# Altium PCB Nissan-RB25DET-ECU.PcbDoc (part 1 of 2)
Units mm, origin at the board's own origin, x right, y up, seen from the top; angles counter-clockwise.
Board outline 159 x 152 mm, 2 copper layers (Top Layer, Bottom Layer); 165 components, 7 nets, 721 pads, 78 vias.
Unrouted connection lines stored in the file: 23.
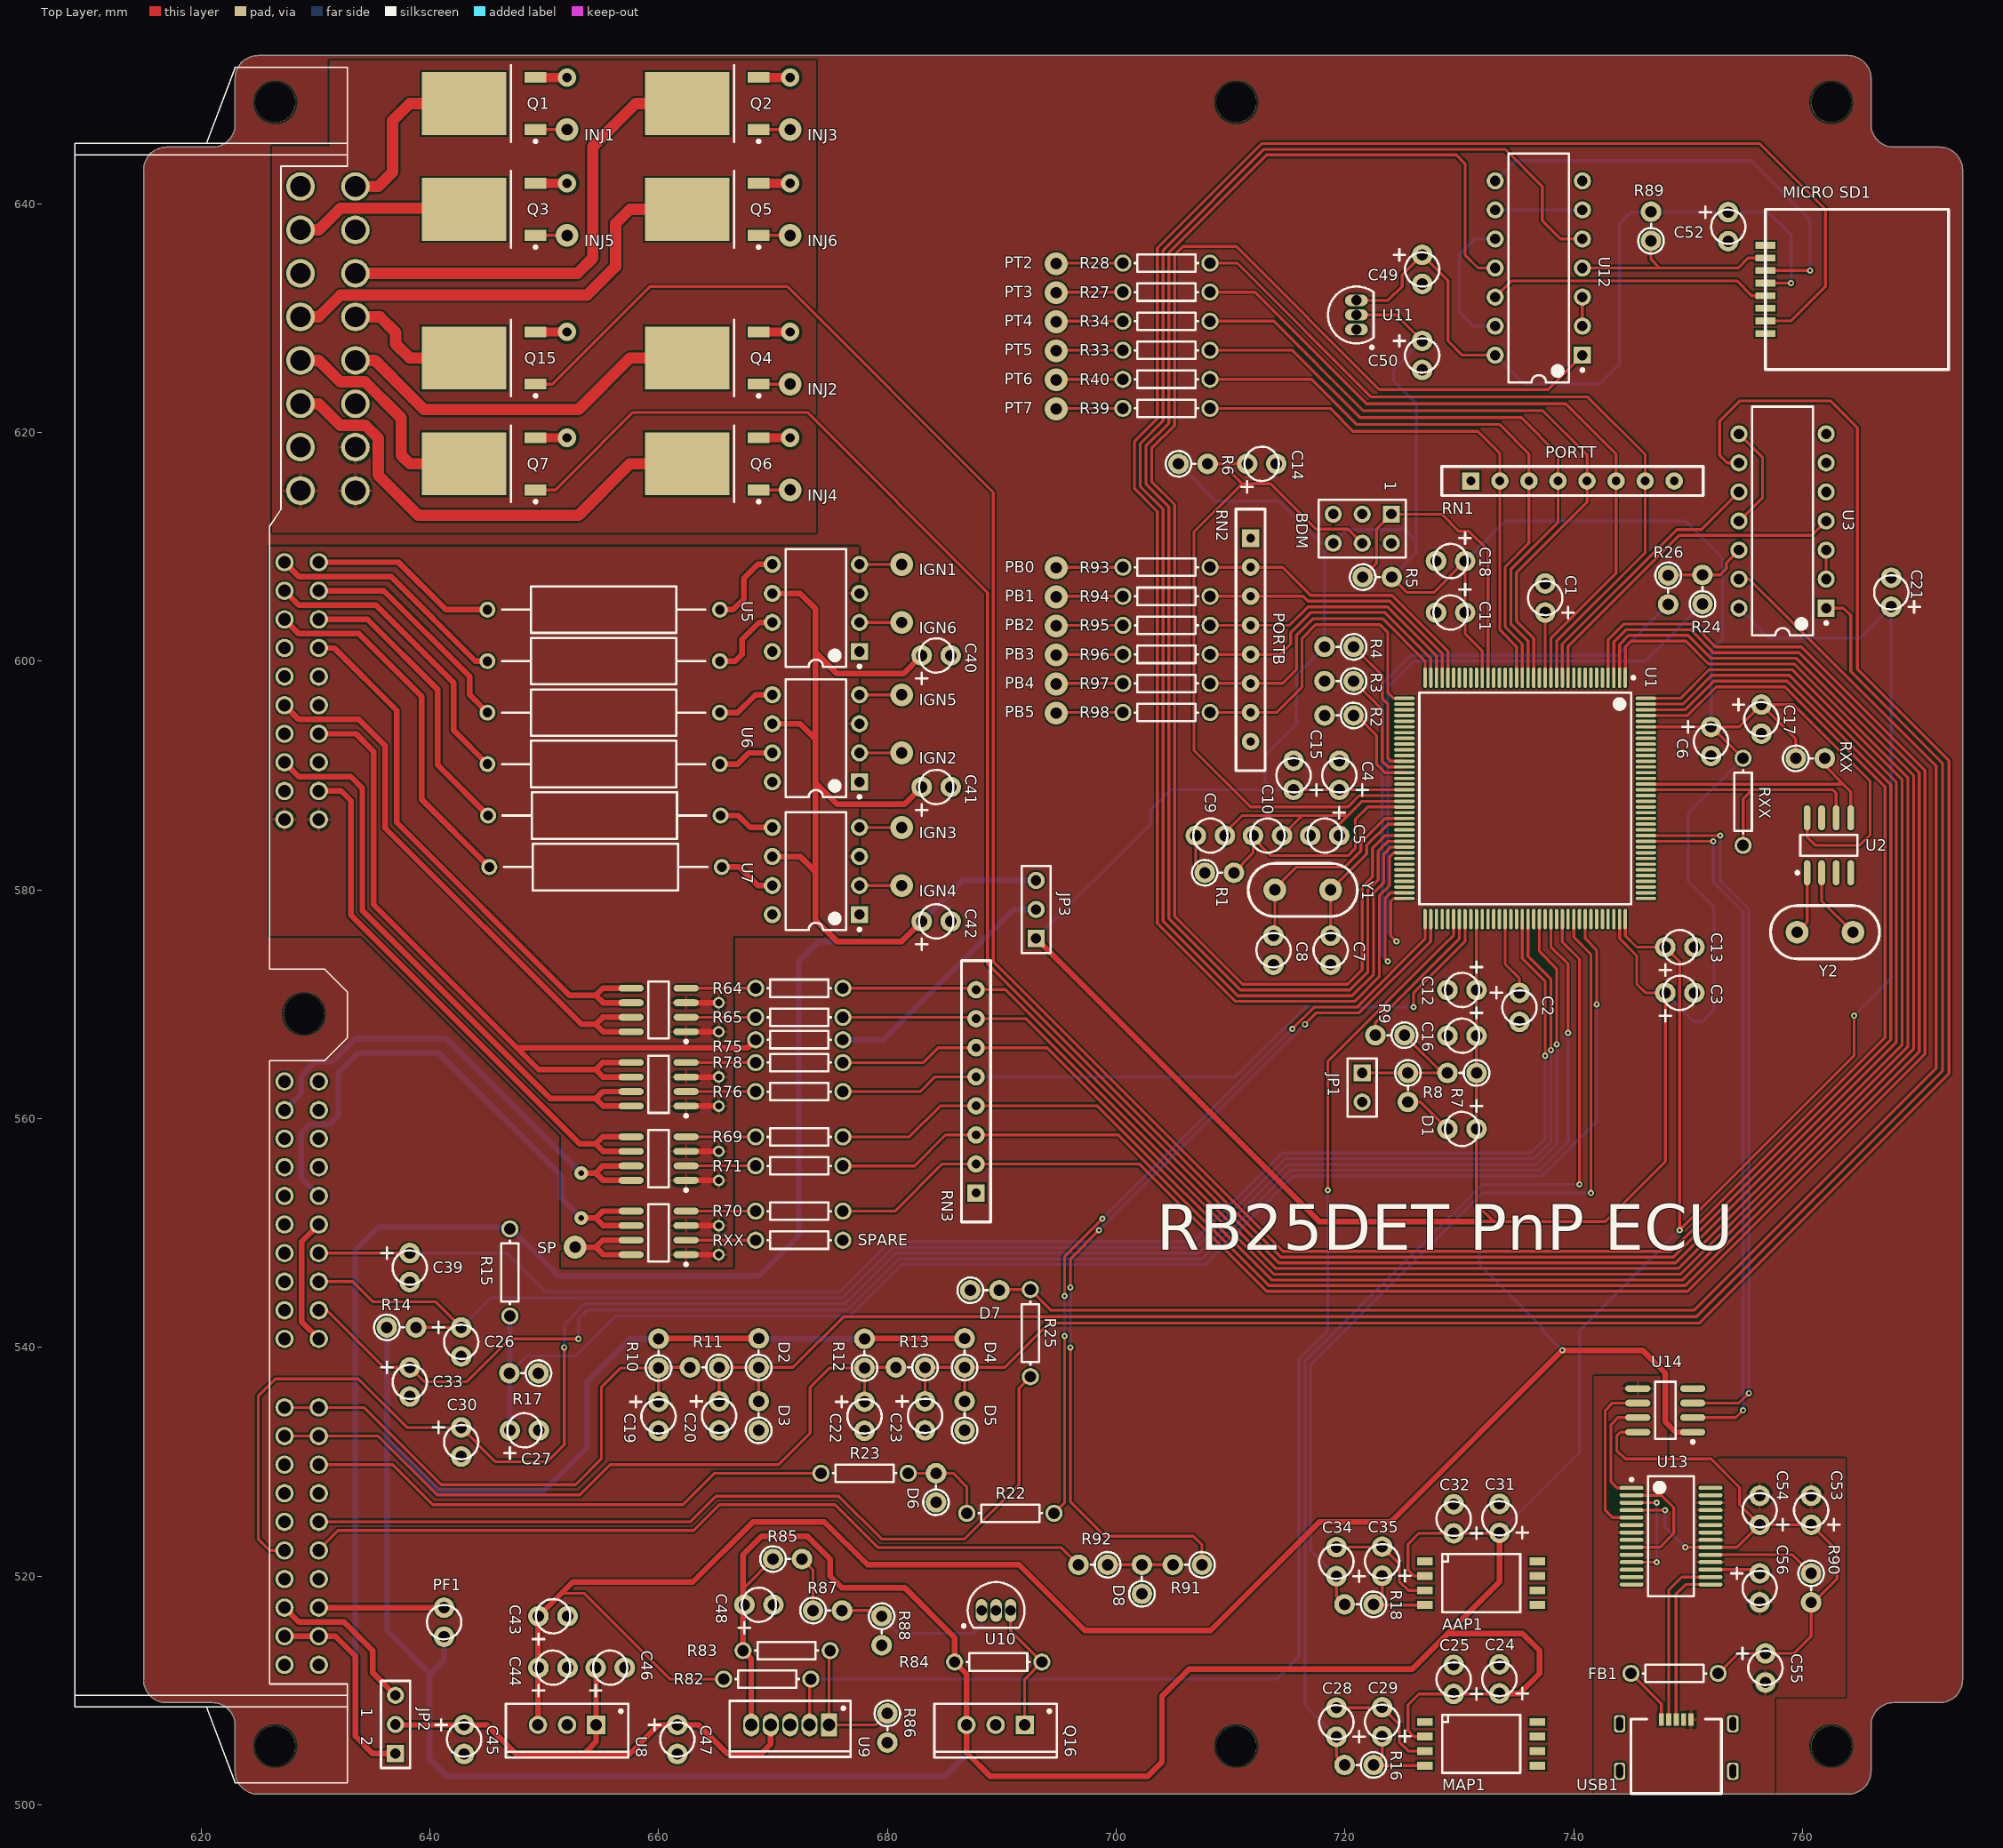
[diagram p0: Top Layer view]
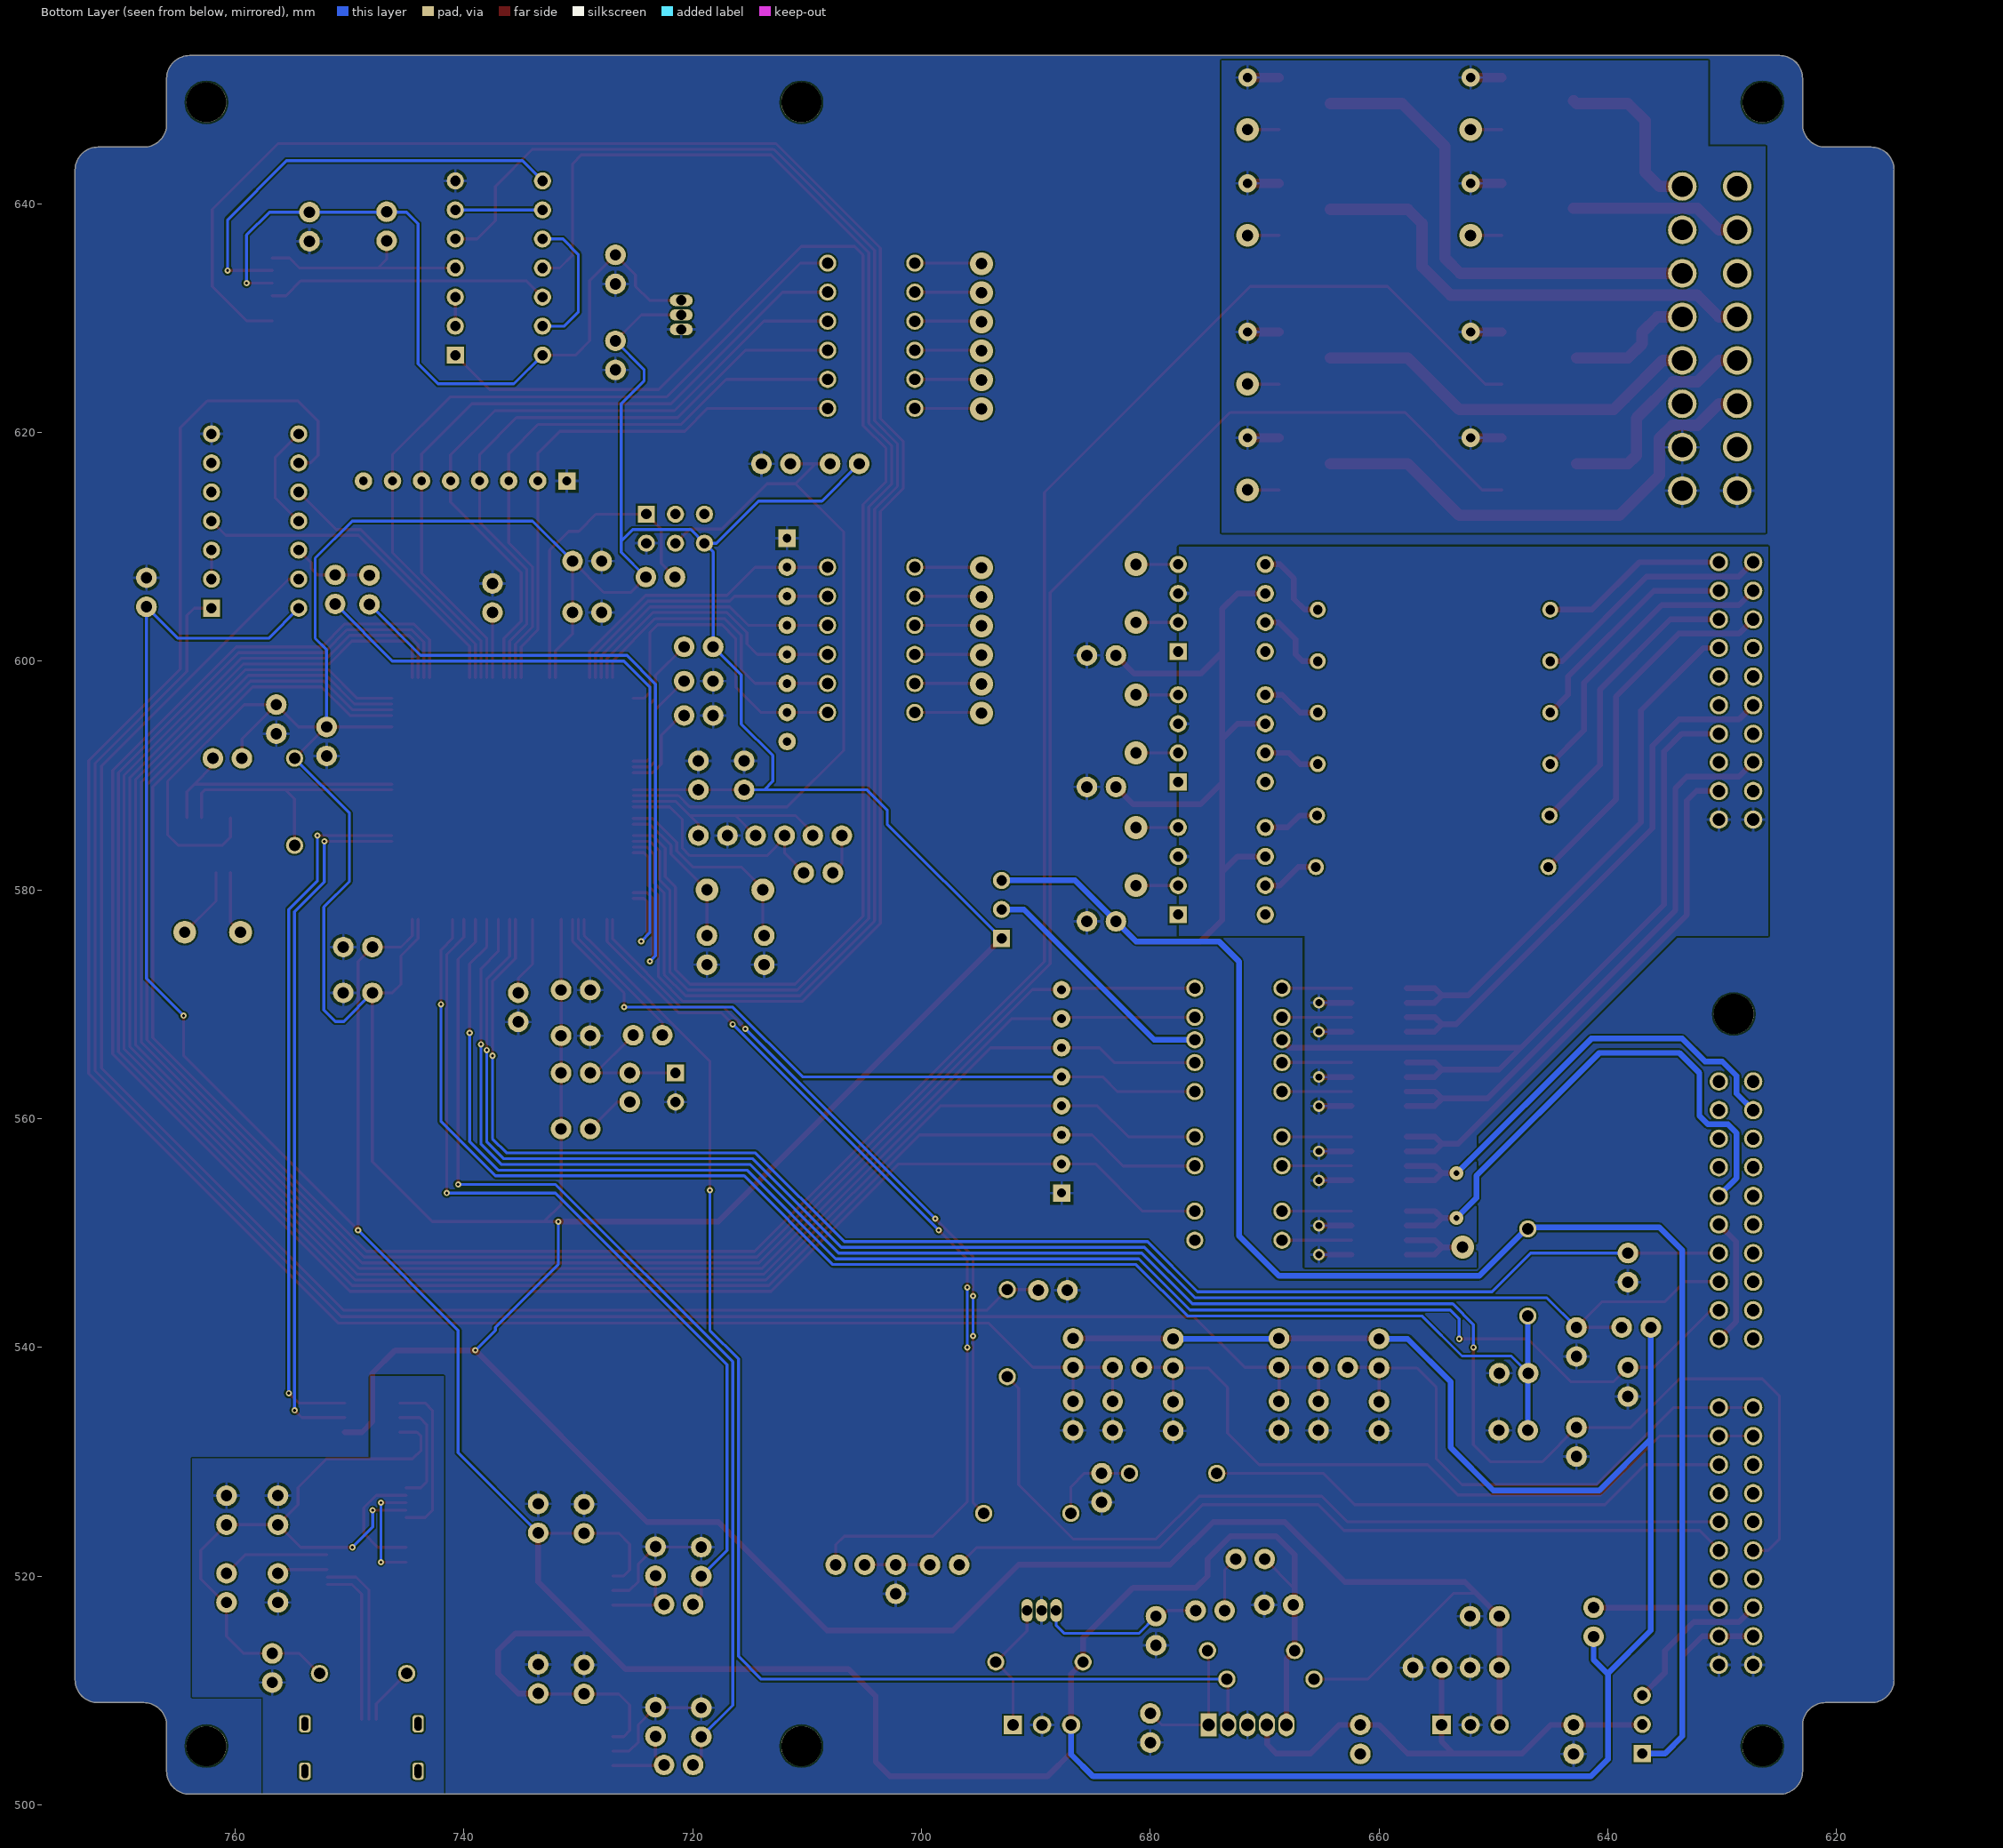
[diagram p1: Bottom Layer view, seen from below]

## Layer stack, top to bottom
Top Solder: solder mask 0.0102, Solder Resist, Dk 3.5
Top Layer: signal copper 0.0356
Dielectric1: dielectric 0.32, FR-4, Dk 4.8
Bottom Layer: signal copper 0.0356
Bottom Solder: solder mask 0.0102, Solder Resist, Dk 3.5

## Board outline
622.983,502.945 622.983,506.945 ccw(c620.983,506.945) 620.983,508.945 616.983,508.945 cw(c616.983,510.945) 614.983,510.945 614.983,642.945 cw(c616.983,642.945) 616.983,644.945 620.983,644.945 ccw(c620.983,646.945) 622.983,646.945 622.983,650.945 cw(c624.983,650.945) 624.983,652.945 763.983,652.945 cw(c763.983,650.945) 765.983,650.945 765.983,646.945 ccw(c767.983,646.945) 767.983,644.945 771.983,644.945 cw(c771.983,642.945) 773.983,642.945 773.983,510.945 cw(c771.983,510.945) 771.983,508.945 767.983,508.945 ccw(c767.983,506.945) 765.983,506.945 765.983,502.945 cw(c763.983,502.945) 763.983,500.945 624.983,500.945 cw(c624.983,502.945)

## Design rules (kind name [scope] priority, off if disabled: settings)
Clearance [All] p1: gap=0.152 ignorepadtopadclearanceinfootprint=FALSE
ComponentClearance [All] p1: gap=0.15 collisioncheckmode=3 verticalgap=0.15 showdistances=FALSE
PolygonConnect [All] p1: connectstyle=Relief reliefconductorwidth=0.254 reliefentries=4 polygonreliefangle="90 Angle" airgapwidth=0.254
RoutingVias [All] p1: holewidth=0.254 width=0.55 viastyle="Through Hole" minholewidth=0.254 minwidth=0.55 maxholewidth=0.711 maxwidth=1.27
ShortCircuit [All] p1: allowed=TRUE
SilkToSolderMaskClearance [IsPad] p1: minsilkscreentomaskgap=0.15 clearancetoexposedcopper=TRUE
SolderMaskExpansion [All] p1: expansion=0.102 istentingtop=FALSE
Width [All] p1: maxlimit=5 minlimit=0.254 preferedwidth=0.254 minimp=50.000000 maximp=50.000000 favimp=50.000000
27 further rules are at their usual default settings.

## Components (designator, comment, footprint, x,y, rotation, side; value= is the part's Value field where it differs from the comment)
AAP1 "Comment" SSOP8 727,521.29 r0 top
C1 "" CAP2.54 737.5,604.25 r90 top
C2 "" CAP2.54 735.25,571 r270 top
C3 "" CAP2.54 748,571 r0 top
C4 "" CAP2.54 719.5,588.75 r90 top
C5 "" CAP2.54 719.5,584.75 r180 top
C6 "" CAP2.54 752,594.25 r270 top
C7 "" CAP2.54NP 718.75,576 r270 top
C8 "" CAP2.54NP 713.75,576 r270 top
C9 "" CAP2.54NP 709.5,584.75 r180 top
C10 "" CAP2.54NP 714.5,584.75 r180 top
C11 "" CAP2.54 730.5,604.25 r180 top
C12 "" CAP2.54 731.5,571.25 r180 top
C13 "" CAP2.54 748,575 r0 top
C14 "" CAP2.54 711.45,617.25 r0 top
C15 "" CAP2.54 715.5,588.75 r90 top
C16 "" CAP2.54 731.5,567.25 r180 top
C17 "" CAP2.54 756.4,596.2 r270 top
C18 "" CAP2.54 730.5,608.75 r180 top
C19 "" CAP2.54 660,535.25 r270 top
C20 "" CAP2.54 665.29,535.29 r270 top
C21 "" CAP2.54 767.75,604.75 r90 top
C22 "" CAP2.54 678,535.25 r270 top
C23 "" CAP2.54 683.29,535.29 r270 top
C24 "" CAP2.54 733.5,509.75 r90 top
C25 "" CAP2.54 729.5,509.71 r90 top
C26 "" CAP2.54 642.75,541.75 r270 top
C27 "" CAP2.54 647,532.75 r0 top
C28 "" CAP2.54 719.25,505.96 r90 top
C29 "" CAP2.54 723.25,506 r90 top
C30 "" CAP2.54 642.75,533 r270 top
C31 "" CAP2.54 733.5,523.79 r90 top
C32 "" CAP2.54 729.5,523.75 r90 top
C33 "" CAP2.54 638.25,538.25 r270 top
C34 "" CAP2.54 719.25,520 r90 top
C35 "" CAP2.54 723.25,520.04 r90 top
C39 "" CAP2.54 638.25,548.25 r270 top
C40 "" CAP2.54 683,600.5 r0 top
C41 "" CAP2.54 683,589 r0 top
C42 "" CAP2.54 683,577.25 r0 top
C43 "" CAP2.54 649.5,516.5 r0 top
C44 "" CAP2.54 649.5,512 r0 top
C45 "" CAP2.54 643,507 r270 top
C46 "" CAP2.54 654.5,512 r0 top
C47 "" CAP2.54 661.64,507 r270 top
C48 "" CAP2.54 667.5,517.5 r0 top
C49 "" CAP2.54 726.75,635.52 r270 top
C50 "" CAP2.54 726.75,628 r270 top
C52 "" CAP2.54 753.5,639.25 r270 top
C53 "" CAP2.54 760.75,524.5 r90 top
C54 "" CAP2.54 756.25,524.5 r90 top
C55 "" CAP2.54 756.75,513.25 r270 top
C56 "" CAP2.54 756.25,520.25 r270 top
D1 "" CAP2.54 731.5,559.1 r180 top
D2 "" RES2.54 668.75,538.25 r90 top
D3 "" RES2.54 668.75,532.75 r90 top
D4 "" RES2.54 686.75,538.25 r90 top
D5 "" RES2.54 686.75,532.75 r90 top
D6 "" RES2.54 684.25,526.46 r90 top
D7 "" RES2.54 687.25,545 r0 top
D8 "" RES2.54 702.25,518.46 r90 top
FB1 "Comment" axial-0.3 748.81,511.5 r0 top
JP1 "Comment" HDR1X2 721.5,564 r270 top
JP2 "Comment" HDR1X3 637,504.5 r90 top
JP3 "Comment" HDR1X3 693,575.75 r90 top
MAP1 "Comment" SSOP8 727,507.25 r0 top
"MICRO SD1" "" DM3D-SF 756.75,632.5 r270 top
PF1 "" CAP2.54NP 641.25,517.25 r270 top
Q1 "" TO-252AA_N 644.75,648.75 r180 top
Q2 "" TO-252AA_N 664.25,648.75 r180 top
Q3 "" TO-252AA_N 644.75,639.5 r180 top
Q4 "" TO-252AA_N 664.25,626.5 r180 top
Q5 "" TO-252AA_N 664.25,639.5 r180 top
Q6 "" TO-252AA_N 664.25,617.25 r180 top
Q7 "" TO-252AA_N 644.75,617.25 r180 top
Q15 "" TO-252AA_N 644.75,626.5 r180 top
Q16 "Comment" TO-220AB 689.46,507 r180 top
R1 "" RES2.54 707.75,581.5 r0 top
R2 "" RES2.54 720.75,595.25 r180 top
R3 "" RES2.54 720.75,598.25 r180 top
R4 "" RES2.54 720.75,601.25 r180 top
R5 "" RES2.54 721.55,607.35 r0 top
R6 "" RES2.54 705.45,617.25 r0 top
R7 "" RES2.54 731.5,564 r180 top
R8 "" RES2.54 725.5,564 r270 top
R9 "" RES2.54 725.2,567.3 r180 top
R10 "" RES2.54 660,538.21 r90 top
R11 "" RES2.54 665.29,538.25 r180 top
R12 "" RES2.54 678,538.21 r90 top
R13 "" RES2.54 683.29,538.25 r180 top
R14 "" RES2.54 636.25,541.75 r0 top
R15 "Comment" axial-0.3 647,546.56 r90 top
R16 "" RES2.54 722.5,503.5 r180 top
R17 "" RES2.54 649.5,537.75 r180 top
R18 "" RES2.54 722.5,517.54 r180 top
R22 "Comment" axial-0.3 690.75,525.5 r0 top
R23 "Comment" axial-0.3 678,529 r0 top
R24 "" RES2.54 751.25,605 r90 top
R25 "Comment" axial-0.3 692.5,541.25 r270 top
R26 "" RES2.54 748.25,607.5 r270 top
R27 "Comment" axial-0.3 704.39,632.26 r0 top
R28 "Comment" axial-0.3 704.39,634.8 r0 top
R33 "Comment" axial-0.3 704.39,627.18 r0 top
R34 "Comment" axial-0.3 704.39,629.72 r0 top
R39 "Comment" axial-0.3 704.39,622.1 r0 top
R40 "Comment" axial-0.3 704.39,624.64 r0 top
R64 "Comment" axial-0.3 672.3,571.4 r0 top
R65 "Comment" axial-0.3 672.3,568.86 r0 top
R69 "Comment" axial-0.3 672.3,558.41 r0 top
R70 "Comment" axial-0.3 672.3,551.915 r0 top
R71 "Comment" axial-0.3 672.3,555.87 r0 top
R75 "Comment" axial-0.3 672.3,566.9 r0 top
R76 "Comment" axial-0.3 672.3,562.365 r0 top
R78 "Comment" axial-0.3 672.3,564.905 r0 top
R82 "Comment" axial-0.3 669.5,511 r0 top
R83 "Comment" axial-0.3 671.19,513.5 r0 top
R84 "Comment" axial-0.3 689.69,512.5 r0 top
R85 "" RES2.54 670,521.5 r0 top
R86 "" RES2.54 680,508 r270 top
R87 "" RES2.54 673.5,517 r0 top
R88 "" RES2.54 679.5,516.5 r270 top
R89 "" RES2.54 746.75,636.75 r90 top
R90 "" RES2.54 760.75,520.25 r270 top
R91 "" RES2.54 707.5,521 r180 top
R92 "" RES2.54 699.25,521 r180 top
R93 "Comment" axial-0.3 704.4,608.21 r0 top
R94 "Comment" axial-0.3 704.4,605.67 r0 top
R95 "Comment" axial-0.3 704.4,603.13 r0 top
R96 "Comment" axial-0.3 704.4,600.59 r0 top
R97 "Comment" axial-0.3 704.4,598.05 r0 top
R98 "Comment" axial-0.3 704.4,595.51 r0 top
RN1 "Comment" RNSIP 731,615.75 r0 top
RN2 "Comment" RNSIP 711.75,610.75 r270 top
RN3 "Comment" RNSIP 687.75,553.5 r90 top
RXX "Comment" axial-0.3 672.3,549.375 r0 top
RXX "" RES2.54 759.4,591.5 r0 top
RXX "Comment" axial-0.3 754.8,587.7 r90 top
U1 "" LQFP144 735.75,588 r270 top
U2 "Comment" SO8_N 762.3,583.9 r90 top
U3 "" DIP14 758.25,612.25 r180 top
U5 "Comment" DIP-8 673.75,604.65 r180 top
U6 "Comment" DIP-8 673.75,593.25 r180 top
U7 "Comment" DIP-8 673.75,581.65 r180 top
U8 "Comment" TO-220AB 652,507 r180 top
U9 "" T05A 671.5,507 r180 top
U10 "" TO-92A 689.5,517 r270 top
U11 "" TO-92A 721,630.27 r0 top
U12 "" DIP14 736.94,634.37 r180 top
U13 "" SSOP-28_N 748.5,523.5 r0 top
U14 "" SOIC127P600-8N 748,534.5 r180 top
USB1 "Comment" "MOLEX 47642-0001" 744,501 r0 top
Y1 "" HC49/US 718.75,580 r180 top
Y2 "" HC49/US 764.4,576.3 r180 top
? "Comment" axial-0.8 655.36,582 r0 top
? "Comment" axial-0.8 655.26,586.5 r0 top
? "Comment" axial-0.8 655.2,595.5 r0 top
? "Comment" axial-0.8 655.2,591 r0 top
? "Comment" axial-0.8 655.2,600 r0 top
? "Comment" axial-0.8 655.2,604.5 r0 top
? "" "76pin ECCS Connector" 628.7,641.5 r0 top locked
? "" HDR2X3 724.05,612.85 r180 top
? "Comment" SO8_N 660,569.5 r180 top
? "Comment" SO8_N 660,563.005 r180 top
? "Comment" SO8_N 660,556.51 r180 top
? "Comment" SO8_N 660,550.015 r180 top

## Footprints (in the part's own frame and the unit in brackets; to place one, negate y for a bottom-side part, rotate by r counter-clockwise, add the part's x,y. Pads: shape width x height; smd on the part's side, far side on the other; paste and mask are expansions set on the pad)
"76pin ECCS Connector" [mm]
  round 1.6 hole 1.1: 1(1.6,-32.85) 2(1.6,-35.35) 3(1.6,-37.85) 4(1.6,-40.35) 5(1.6,-42.85) 6(1.6,-45.35) 7(1.6,-47.85) 8(1.6,-50.35) 9(1.6,-52.85) 10(1.6,-55.35) 11(-1.4,-32.85) 12(-1.4,-35.35) 13(-1.4,-37.85) 14(-1.4,-40.35) 15(-1.4,-42.85) 16(-1.4,-45.35) 17(-1.4,-47.85) 18(-1.4,-50.35) 19(-1.4,-52.85) 20(-1.4,-55.35) 21(1.6,-78.25) 22(1.6,-80.75) 23(1.6,-83.25) 24(1.6,-85.75) 25(1.6,-88.25) 26(1.6,-90.75) 27(1.6,-93.25) 28(1.6,-95.75) 29(1.6,-98.25) 30(1.6,-100.75) 31(-1.4,-78.25) 32(-1.4,-80.75) 33(-1.4,-83.25) 34(-1.4,-85.75) 35(-1.4,-88.25) 36(-1.4,-90.75) 37(-1.4,-93.25) 38(-1.4,-95.75) 39(-1.4,-98.25) 40(-1.4,-100.75) 41(1.6,-106.75) 42(1.6,-109.25) 43(1.6,-111.75) 44(1.6,-114.25) 45(1.6,-116.75) 46(1.6,-119.25) 47(1.6,-121.75) 48(1.6,-124.25) 49(1.6,-126.75) 50(1.6,-129.25) 51(-1.4,-106.75) 52(-1.4,-109.25) 53(-1.4,-111.75) 54(-1.4,-114.25) 55(-1.4,-116.75) 56(-1.4,-119.25) 57(-1.4,-121.75) 58(-1.4,-124.25) 59(-1.4,-126.75) 60(-1.4,-129.25)
  round 2.5 hole 1.8: 101(4.8,0) 102(4.8,-3.8) 103(4.8,-7.6) 104(4.8,-11.4) 105(4.8,-15.2) 106(4.8,-19) 107(4.8,-22.8) 108(4.8,-26.6) 109(0,0) 110(0,-3.8) 111(0,-7.6) 112(0,-11.4) 113(0,-15.2) 114(0,-19) 115(0,-22.8) 116(0,-26.6)
  round 3.5 hole 3.5: X(-2.2,-136.35) X(-2.2,7.35) X(0.3,-72.35)
  silkscreen extent -19.71,-139.58 4.09,10.42
axial-0.3 [mm] "Axial Device, Thru-Hole; 2 Leads; 0.3 in Pin Spacing"
  round 1.5 hole 1: 1(-3.81,0) 2(3.81,0)
  silkscreen extent -2.77,-0.76 2.77,0.76
axial-0.8 [mm] "Axial Device, Thru-Hole; 2 Leads; 0.8 in Pin Spacing"
  round 1.4 hole 0.85: 1(-10.16,0) 2(10.16,0)
  silkscreen extent -8.89,-2.03 8.89,2.03
CAP2.54 [mm]
  round 1.8 hole 1: 1(0,0) 2(2.54,0)
  silkscreen extent -0.5,-2.5 2.77,1.5
CAP2.54NP [mm]
  round 1.8 hole 1: 1(0,0) 2(2.54,0)
  silkscreen extent -0.23,-1.5 2.77,1.5
DIP14 [mm] "DIP, 14-Leads, Row Spacing 7.62mm, Pitch 2.54mm, Body 19.6x6.3mm"
  rect 1.5x1.5 hole 0.9: 1(-3.81,7.62)
  round 1.5 hole 0.9: 2(-3.81,5.08) 3(-3.81,2.54) 4(-3.81,0) 5(-3.81,-2.54) 6(-3.81,-5.08) 7(-3.81,-7.62) 8(3.81,-7.62) 9(3.81,-5.08) 10(3.81,-2.54) 11(3.81,0) 12(3.81,2.54) 13(3.81,5.08) 14(3.81,7.62)
  silkscreen extent -3.94,-10 2.65,10, body extent -3.3,-10 3.3,10, height 4.8
DIP-8 [mm] "DIP; 8 Leads; Row Spacing 7.62 mm; Pitch 2.54 mm"
  rect 1.5x1.5 hole 0.9: 1(-3.81,3.81)
  round 1.5 hole 0.9: 2(-3.81,1.27) 3(-3.81,-1.27) 4(-3.81,-3.81) 5(3.81,-3.81) 6(3.81,-1.27) 7(3.81,1.27) 8(3.81,3.81)
  silkscreen extent -3.94,-5.15 2.65,5.23, body extent -3.6,-5.15 3.6,5.15, height 5.08
DM3D-SF [mm]
  rect 0.6x1.75 smd: 1(-3.85,0) 2(-2.75,0) 3(-1.65,0) 4(-0.55,0) 5(0.55,0) 6(1.65,0) 7(2.75,0) 8(3.85,0)
  silkscreen extent -7,0 7,16
HC49/US [mm]
  round 2 hole 1: 1(0,0) 2(4.88,0)
  silkscreen extent -2.32,-2.33 7.2,2.33
HDR1X2 [mm] "Connector; Header; 2 Position"
  rect 1.5x1.5 hole 0.9: 1(0,0)
  round 1.5 hole 0.9: 2(2.54,0)
  silkscreen extent -1.27,-1.27 3.81,1.27
HDR1X3 [mm] "Connector; Header; 3 Position"
  rect 1.5x1.5 hole 0.9: 1(0,0)
  round 1.5 hole 0.9: 2(2.54,0) 3(5.08,0)
  silkscreen extent -1.27,-1.27 6.35,1.27
HDR2X3 [mm] "Connector; Header; 3x2 Position"
  rect 1.5x1.5 hole 0.9: 1(0,0)
  round 1.5 hole 0.9: 2(0,2.54) 3(2.54,0) 4(2.54,2.54) 5(5.08,0) 6(5.08,2.54)
  silkscreen extent -1.27,-1.27 6.35,3.81
LQFP144 [mm] "Thin QFP, 144-Leads, Body 20x20mm, Pitch 0.5mm, IPC Medium Density"
  oval 1.8x0.3 smd: 1(-10.55,8.75) 2(-10.55,8.25) 3(-10.55,7.75) 4(-10.55,7.25) 5(-10.55,6.75) 6(-10.55,6.25) 7(-10.55,5.75) 8(-10.55,5.25) 9(-10.55,4.75) 10(-10.55,4.25) 11(-10.55,3.75) 12(-10.55,3.25) 13(-10.55,2.75) 14(-10.55,2.25) 15(-10.55,1.75) 16(-10.55,1.25) 17(-10.55,0.75) 18(-10.55,0.25) 19(-10.55,-0.25) 20(-10.55,-0.75) 21(-10.55,-1.25) 22(-10.55,-1.75) 23(-10.55,-2.25) 24(-10.55,-2.75) 25(-10.55,-3.25) 26(-10.55,-3.75) 27(-10.55,-4.25) 28(-10.55,-4.75) 29(-10.55,-5.25) 30(-10.55,-5.75) 31(-10.55,-6.25) 32(-10.55,-6.75) 33(-10.55,-7.25) 34(-10.55,-7.75) 35(-10.55,-8.25) 36(-10.55,-8.75) 73(10.55,-8.75) 74(10.55,-8.25) 75(10.55,-7.75) 76(10.55,-7.25) 77(10.55,-6.75) 78(10.55,-6.25) 79(10.55,-5.75) 80(10.55,-5.25) 81(10.55,-4.75) 82(10.55,-4.25) 83(10.55,-3.75) 84(10.55,-3.25) 85(10.55,-2.75) 86(10.55,-2.25) 87(10.55,-1.75) 88(10.55,-1.25) 89(10.55,-0.75) 90(10.55,-0.25) 91(10.55,0.25) 92(10.55,0.75) 93(10.55,1.25) 94(10.55,1.75) 95(10.55,2.25) 96(10.55,2.75) 97(10.55,3.25) 98(10.55,3.75) 99(10.55,4.25) 100(10.55,4.75) 101(10.55,5.25) 102(10.55,5.75) 103(10.55,6.25) 104(10.55,6.75) 105(10.55,7.25) 106(10.55,7.75) 107(10.55,8.25) 108(10.55,8.75)
  oval 0.3x1.8 smd: 37(-8.75,-10.55) 38(-8.25,-10.55) 39(-7.75,-10.55) 40(-7.25,-10.55) 41(-6.75,-10.55) 42(-6.25,-10.55) 43(-5.75,-10.55) 44(-5.25,-10.55) 45(-4.75,-10.55) 46(-4.25,-10.55) 47(-3.75,-10.55) 48(-3.25,-10.55) 49(-2.75,-10.55) 50(-2.25,-10.55) 51(-1.75,-10.55) 52(-1.25,-10.55) 53(-0.75,-10.55) 54(-0.25,-10.55) 55(0.25,-10.55) 56(0.75,-10.55) 57(1.25,-10.55) 58(1.75,-10.55) 59(2.25,-10.55) 60(2.75,-10.55) 61(3.25,-10.55) 62(3.75,-10.55) 63(4.25,-10.55) 64(4.75,-10.55) 65(5.25,-10.55) 66(5.75,-10.55) 67(6.25,-10.55) 68(6.75,-10.55) 69(7.25,-10.55) 70(7.75,-10.55) 71(8.25,-10.55) 72(8.75,-10.55) 109(8.75,10.55) 110(8.25,10.55) 111(7.75,10.55) 112(7.25,10.55) 113(6.75,10.55) 114(6.25,10.55) 115(5.75,10.55) 116(5.25,10.55) 117(4.75,10.55) 118(4.25,10.55) 119(3.75,10.55) 120(3.25,10.55) 121(2.75,10.55) 122(2.25,10.55) 123(1.75,10.55) 124(1.25,10.55) 125(0.75,10.55) 126(0.25,10.55) 127(-0.25,10.55) 128(-0.75,10.55) 129(-1.25,10.55) 130(-1.75,10.55) 131(-2.25,10.55) 132(-2.75,10.55) 133(-3.25,10.55) 134(-3.75,10.55) 135(-4.25,10.55) 136(-4.75,10.55) 137(-5.25,10.55) 138(-5.75,10.55) 139(-6.25,10.55) 140(-6.75,10.55) 141(-7.25,10.55) 142(-7.75,10.55) 143(-8.25,10.55) 144(-8.75,10.55)
  silkscreen extent -10.67,-9.25 9.25,9.58, body extent -10,-10 10,10, height 1.6
"MOLEX 47642-0001" [mm]
  rect 0.45x1.1 smd: 1(3.65,6.47) 2(4.3,6.47) 3(4.95,6.47) 4(5.6,6.47) 5(6.25,6.47)
  rrect50% 1x1.5 hole 0.6 slot 1.2 at 90 deg: X(0,1.95) X(0,6.1) X(9.9,1.95) X(9.9,6.1)
  silkscreen extent 1,0 8.9,6.5
RES2.54 [mm]
  round 1.8 hole 1: 1(0,0) 2(2.54,0)
  silkscreen extent -1.12,-1.12 1.5,1.11
RNSIP [mil]
  rect 60x60 hole 30: 1(0,0)
  round 60 hole 30: 2(100,0) 3(200,0) 4(300,0) 5(400,0) 6(500,0) 7(600,0) 8(700,0)
  silkscreen extent -100,-50 800,50
SO8_N [mm] "SOIC, 8-Leads, Body 4.9x3.9mm, Pitch 1.27mm, IPC Medium Density"
  oval 2.2x0.6 smd: 1(-2.4,1.905) 2(-2.4,0.635) 3(-2.4,-0.635) 4(-2.4,-1.905) 5(2.4,-1.905) 6(2.4,-0.635) 7(2.4,0.635) 8(2.4,1.905)
  silkscreen extent -2.52,-2.5 0.9,2.88, body extent -2,-2.5 2,2.5, height 1.75
SOIC127P600-8N [mm] "SOIC, 8-Leads, Body 4.9x3.9mm, Pitch 1.27mm, IPC Medium Density"
  oval 2.2x0.6 smd: 1(-2.4,1.905) 2(-2.4,0.635) 3(-2.4,-0.635) 4(-2.4,-1.905) 5(2.4,-1.905) 6(2.4,-0.635) 7(2.4,0.635) 8(2.4,1.905)
  silkscreen extent -2.53,-2.5 0.9,2.88, body extent -2,-2.5 2,2.5, height 1.75
SSOP8 [mm] "Super Small Outline Package, 8-pin"
  rect 1.35x0.69 smd: 1(0,0) 2(0,-1.27) 3(0,-2.54) 4(0,-3.81) 5(9.83,-3.81) 6(9.83,-2.54) 7(9.83,-1.27) 8(9.83,0)
  silkscreen extent 1.51,-4.45 8.32,0.63
SSOP-28_N [mm] "SOP, 28-Leads, Body 10.2x5.3mm, Pitch 0.65mm, IPC Medium Density"
  oval 2.1x0.35 smd: 1(-3.45,4.225) 2(-3.45,3.575) 3(-3.45,2.925) 4(-3.45,2.275) 5(-3.45,1.625) 6(-3.45,0.975) 7(-3.45,0.325) 8(-3.45,-0.325) 9(-3.45,-0.975) 10(-3.45,-1.625) 11(-3.45,-2.275) 12(-3.45,-2.925) 13(-3.45,-3.575) 14(-3.45,-4.225) 15(3.45,-4.225) 16(3.45,-3.575) 17(3.45,-2.925) 18(3.45,-2.275) 19(3.45,-1.625) 20(3.45,-0.975) 21(3.45,-0.325) 22(3.45,0.325) 23(3.45,0.975) 24(3.45,1.625) 25(3.45,2.275) 26(3.45,2.925) 27(3.45,3.575) 28(3.45,4.225)
  silkscreen extent -3.57,-5.25 2,5.25, body extent -2.8,-5.25 2.8,5.25, height 2
T05A [mm] "TO, Thru-Hole, Vertical, Heatsink Mounted; 5 In-Line Leads; Pitch 1.70 mm"
  rect 1.4x2 hole 1.1: 1(-3.4,0)
  oval 1.4x2 hole 1.1: 2(-1.7,0) 3(0,0) 4(1.7,0) 5(3.4,0)
  silkscreen extent -5.3,-2.1 5.3,2.8, body extent -5.35,-2.15 5.35,2.85, height 15.9
TO-92A [mm] "TO, Flat Index; 3 In-Line, Axial Leads; Body Dia. 4.5mm; Leads 0.51 x 0.48 mm (max)"
  oval 2x1 hole 0.9: 1(0,-1.27) 2(0,0) 3(0,1.27)
  silkscreen extent -2.48,-2.95 1.5,2.48, body extent -2.48,-2.5 1.5,2.5, height 6.86
TO-220AB [mm] "TO, Thru-Hole, Vertical, Heatsink Mounted; 3 In-Line Leads; Pitch 2.54 mm"
  rect 1.6x1.6 hole 1: 1(-2.54,0)
  round 1.6 hole 1: 2(0,0) 3(2.54,0)
  silkscreen extent -5.35,-1.85 5.35,2.85, body extent -5.4,-1.9 5.4,2.9, height 19.3
TO-252AA_N [mm] "D-PAK, 4-Leads, Body 6.1x6.5mm, Pitch 2.28mm, Lead Span 9.9mm, IPC Medium Density"
  rect 7.4x5.5 smd: D(1.75,0)
  rect 1.9x0.95 smd: G(-4.5,2.28) S(-4.5,-2.28)
  silkscreen extent -4.62,-3.35 -2.35,3.43, body extent -2.25,-3.37 4.1,3.37, height 2.38

## Free pads (board coordinates)
  round 3.5 hole 3.5: X(710.5,505.15) X(710.5,648.85) X(762.503,505.15) X(762.503,648.85)

## Via types
v1: diameter 0.55, hole 0.254, Top Layer to Bottom Layer, 35 vias
v2: diameter 2, hole 1, Top Layer to Bottom Layer, 25 vias
v3: diameter 1, hole 0.6, Top Layer to Bottom Layer, 8 vias
v4: diameter 1.6, hole 0.8, Top Layer to Bottom Layer, 7 vias
v5: diameter 1.2, hole 0.5, Top Layer to Bottom Layer, 2 vias
v6: diameter 1.6/1.6 (per signal layer), hole 0.8, Top Layer to Bottom Layer, 1 vias

## Nets (pads, with @x,y where several pads share a name; then routed paths per layer and width w, separated by ;. In a path a pad name is that pad's centre, name@x,y a point inside that pad or via, vN(x,y) a via of type N, cw(c..) or ccw(c..) an arc to the next point about the centre after c; other vN are vias at no path point)
"+5V MICRO": ?.6@718.97,610.31 C3.1 C4.1 C6.1 C11.1 C12.1 C15.1 C16.1 C17.1 C18.1 C43.1 C44.1 C50.1 D1.1 R4.2 R5.2 R6.1 R7.1 RXX.1@759.4,591.5 RXX.2@754.8,591.51 U1.26 U1.53 U1.82 U1.107 U1.127 U1.139 U2.8 U8.3 U11.2 U14.1 | length 467.2
  Top Layer w0.254: C15.1@715.5,588.75 C4.1@719.5,588.75 U1.53@725.2,588.75 ; U11.2@721,630.27 724.48,630.27 C50.1@726.75,628 ; R5.2@724.09,607.35 725.44,606 727.75,606 C18.1@730.5,608.75 C11.1@730.5,604.25 730.5,602.4 732,600.9 U1.26@732,598.55 ; U1.82@731.5,577.45 C12.1@731.5,571.25 C16.1@731.5,567.25 R7.1@731.5,564 D1.1@731.5,559.1 731.5,552.499 733,550.999 ; v1(731.749,550.999) 742.749,550.999 748,556.25 C3.1@748,571 746.25,571 745.5,571.75 745.5,574.25 744,575.75 U1.107@744,577.45 ; v1@738.999,539.751 v1(739,539.75) ; U1.139@746.3,594.25 C6.1@752,594.25 C6.1@752.06,594.25 ; RXX.2@754.8,591.51 C6.1@752.06,594.25 ; RXX.1@759.4,591.5 759.4,593.2 C17.1@756.4,596.2 ; U2.8@760.395,586.3 760.395,584.605 761.1,583.9 765,583.9 765.9,584.8 765.9,589.5 759.2,596.2 C17.1@756.4,596.2 ; C6.1@752.06,594.25 754.45,594.25 C17.1@756.4,596.2
  Top Layer w0.5: U8.3@649.46,507 649.46,516.46 652.5,519.5 663,519.5 668.25,524.75 674.5,524.75 678.25,521 691.5,521 697.25,515.25 708.25,515.25 717.75,524.75 724,524.75 v1(739,539.75) 746,539.75 748,537.75 748,533.5
  Bottom Layer w0.254: 693,575.75 703,585.75 703,587 704.75,588.75 713.75,588.75 ; R6.1@705.45,617.25 708.7,614 714.25,614 717.94,610.31 ?.6@718.97,610.31 ; C15.1@715.5,588.75 713.75,588.75 ; R5.2@724.09,607.35 726.25,609.51 726.25,610.5 ; C50.1@726.75,628 724.25,625.5 724.25,624.5 726.25,622.5 726.25,610.5 ; C18.1@730.5,608.75 734,612.25 749.75,612.25 753,609 753,602 752,601 C6.1@752,594.25 ; v1(731.749,550.999) 731.749,547.249 737.25,541.747 737.25,541.5 v1(739,539.75) ; C3.1@748,571 750.5,568.5 751.25,568.5 752.25,569.5 752.25,578.5 750,580.75 750,586.71 RXX.2@754.8,591.51 ; 713.75,588.75 713,589.5 713,591.75 715.75,594.5 715.75,598.79 R4.2@718.21,601.25 718.21,609.55 ?.6@718.97,610.31 ; ?.6@718.97,610.31 720.16,611.5 725.25,611.5 726.25,610.5
"+5V SWITCHED": C13.1 C21.1 C24.1 C25.1 C31.1 C32.1 C48.1 JP3.1 Q16.3 R83.1 U1.108 U9.5 | length 254.6
  Top Layer w0.254: U1.108@744.5,577.45 744.5,576 745.5,575 C13.1@748,575 749.25,573.75 749.25,550.25
  Top Layer w0.5: Q16.3@686.92,507 686.92,504.58 689,502.5 702.75,502.5 704,503.75 704,509.5 706.375,511.875 725.875,511.875 729,515 ; JP3.1@693,575.75 717.75,551 731.749,551 ; C24.1@733.5,509.75 735.25,509.75 737,511.5 737,513.5 735.5,515 729,515 ; C31.1@733.5,523.79 733.5,519.5 729,515
  Bottom Layer w0.254: 764.5,569 767.75,572.25 C21.1@767.75,604.75
  Bottom Layer w0.5: 640,511.5 640,504 641.5,502.5 685,502.5 686.92,504.42 Q16.3@686.92,507
GND: "MICRO SD1.6" ?.2@724.05,610.31 ?.50 ?.60 C1.2 C2.2 C3.2 C4.2 C5.2 C6.2 C7.2 C8.2 C11.2 C12.2 C13.2 C14.2 C15.2 C16.2 C17.2 C18.2 C19.2 C20.2 C21.2 C22.2 C23.2 C24.2 C25.2 C26.2 C27.2 C28.2 C29.2 C30.2 C31.2 C32.2 C33.2 C34.2 C35.2 C39.2 C40.2 C41.2 C42.2 C43.2 C44.2 C45.2 C46.2 C48.2 C49.2 C50.2 C52.2 D3.1 D5.1 D6.1 D7.1 D8.1 JP1.2 Q16.2 R2.2 R3.2 R17.1 R86.2 R88.2 RN1.1 RN2.1 RN3.1 U1.16 U1.27 U1.52 U1.57 U1.60 U1.81 U1.88 U1.109 U1.110 U1.138 U2.4 U3.7 U8.2 U9.3 U10.2 U11.1 U12.7 U14.4
"IGN GND": ?.1@662.4,548.11 ?.1@662.4,554.605 ?.1@662.4,561.1 ?.1@662.4,567.595 ?.3@662.4,550.65 ?.3@662.4,557.145 ?.3@662.4,563.64 ?.3@662.4,570.135 ?.10 ?.20 U5.3 U6.3 U7.3 | length 22.9
  Top Layer w0.5: ?.1@662.4,548.11 v3(665.265,548.11) ; ?.3@662.4,550.65 v3(665.265,550.65) ; ?.1@662.4,554.605 v3(665.265,554.605) ; ?.3@662.4,557.145 v3(665.265,557.145) ; ?.1@662.4,561.1 v3(665.265,561.1) ; ?.3@662.4,563.64 v3(665.265,563.64) ; ?.1@662.4,567.595 v3(665.265,567.595) ; ?.3@662.4,570.135 v3(665.265,570.135)
"INJ GND": ?.107 ?.108 ?.116
  other v4: 652,619.53 671.5,619.53 652,628.78 671.5,628.78 652,641.78 671.5,641.78 671.5,651.03
  other v6: 652,651.03
"SEN GND": ?.30
"USB GND": C53.2 C54.2 C55.2 C56.2 U13.7 U13.18 U13.21 U13.25 U13.26 U14.5 USB1.5
pads on no net: "MICRO SD1.1" "MICRO SD1.2" "MICRO SD1.3" "MICRO SD1.4" "MICRO SD1.5" "MICRO SD1.7" "MICRO SD1.8" ?.1@630.3,608.65 ?.1@645.1,586.5 ?.1@645.2,582 ?.1@645.04,591 ?.1@645.04,595.5 ?.1@645.04,600 ?.1@645.04,604.5 ?.1@724.05,612.85 ?.2@630.3,606.15 ?.2@662.4,549.38 ?.2@662.4,555.875 ?.2@662.4,562.37 ?.2@662.4,568.865 ?.2@665.36,591 ?.2@665.36,595.5 ?.2@665.36,600 ?.2@665.36,604.5 ?.2@665.42,586.5 ?.2@665.52,582 ?.3@630.3,603.65 ?.3@721.51,612.85 ?.4 ?.5 ?.6@630.3,596.15 ?.6@657.6,550.65 ?.6@657.6,557.145 ?.6@657.6,563.64 ?.6@657.6,570.135 ?.7 ?.8 ?.9 ?.11 ?.12 ?.13 ?.14 ?.15 ?.16 ?.17 ?.18 ?.19 ?.21 ?.22 ?.23 ?.24 ?.25 ?.26 ?.27 ?.28 ?.29 ?.31 ?.32 ?.33 ?.34 ?.35 ?.36 ?.37 ?.38 ?.39 ?.40 ?.41 ?.42 ?.43 ?.44 ?.45 ?.46 ?.47 ?.48 ?.49 ?.51 ?.52 ?.53 ?.54 ?.55 ?.56 ?.57 ?.58 ?.59 ?.101 ?.102 ?.103 ?.104 ?.105 ?.106 ?.109 ?.110 ?.111 ?.112 ?.113 ?.114 ?.115 ?.X AAP1.1 AAP1.2 AAP1.3 AAP1.4 AAP1.5 AAP1.6 AAP1.7 AAP1.8 C1.1 C2.1 C5.1 C7.1 C8.1 C9.1 C9.2 C10.1 C10.2 C14.1 C19.1 C20.1 C22.1 C23.1 C26.1 C27.1 C28.1 C29.1 C30.1 C33.1 C34.1 C35.1 C39.1 C40.1 C41.1 C42.1 C45.1 C46.1 C47.1 C47.2 C49.1 C52.1 C53.1 C54.1 C55.1 C56.1 D1.2 D2.1 D2.2 D3.2 D4.1 D4.2 D5.2 D6.2 D7.2 D8.2 FB1.1 FB1.2 JP1.1 JP2.1 JP2.2 JP2.3 JP3.2 JP3.3 MAP1.1 MAP1.2 MAP1.3 MAP1.4 MAP1.5 MAP1.6 MAP1.7 MAP1.8 PF1.1 PF1.2 Q1.D Q1.G Q1.S Q2.D Q2.G Q2.S Q3.D Q3.G Q3.S Q4.D Q4.G Q4.S Q5.D Q5.G Q5.S Q6.D Q6.G Q6.S Q7.D Q7.G Q7.S Q15.D Q15.G Q15.S Q16.1 R1.1 R1.2 R2.1 R3.1 R4.1 R5.1 R6.2 R7.2 R8.1 R8.2 R9.1 R9.2 R10.1 R10.2 R11.1 R11.2 R12.1 R12.2 R13.1 R13.2 R14.1 R14.2 R15.1 R15.2 R16.1 R16.2 R17.2 R18.1 R18.2 R22.1 R22.2 R23.1 R23.2 R24.1 R24.2 R25.1 R25.2 R26.1 R26.2 R27.1 R27.2 R28.1 R28.2 R33.1 R33.2 R34.1 R34.2 R39.1 R39.2 R40.1 R40.2 R64.1 R64.2 R65.1 R65.2 R69.1 R69.2 R70.1 R70.2 R71.1 R71.2 R75.1 R75.2 R76.1 R76.2 R78.1 R78.2 R82.1 R82.2 R83.2 R84.1 R84.2 R85.1 R85.2 R86.1 R87.1 R87.2 R88.1 R89.1 R89.2 R90.1 R90.2 R91.1 R91.2 R92.1 R92.2 R93.1 R93.2 R94.1 R94.2 R95.1 R95.2 R96.1 R96.2 R97.1 R97.2 R98.1 R98.2 RN1.2 RN1.3 RN1.4 RN1.5 RN1.6 RN1.7 RN1.8 RN2.2 RN2.3 RN2.4 RN2.5 RN2.6 RN2.7 RN2.8 RN3.2 RN3.3 RN3.4 RN3.5 RN3.6 RN3.7 RN3.8 RXX.1@668.49,549.375 RXX.1@754.8,583.89 RXX.2@676.11,549.375 RXX.2@761.94,591.5 U1.1 U1.2 U1.3 U1.4 U1.5 U1.6 U1.7 U1.8 U1.9 U1.10 U1.11 U1.12 U1.13 U1.14 U1.15 U1.17 U1.18 U1.19 U1.20 U1.21 U1.22 U1.23 U1.24 U1.25 U1.28 U1.29 U1.30 U1.31 U1.32 U1.33 U1.34 U1.35 U1.36 U1.37 U1.38 U1.39 U1.40 U1.41 U1.42 U1.43 U1.44 U1.45 U1.46 U1.47 U1.48 U1.49 U1.50 U1.51 U1.54 U1.55 U1.56 U1.58 U1.59 U1.61 U1.62 U1.63 U1.64 U1.65 U1.66 U1.67 U1.68 U1.69 U1.70 U1.71 U1.72 U1.73 U1.74 U1.75 U1.76 U1.77 U1.78 U1.79 U1.80 U1.83 U1.84 U1.85 U1.86 U1.87 U1.89 U1.90 U1.91 U1.92 U1.93 U1.94 U1.95 U1.96 U1.97 U1.98 U1.99 U1.100 U1.101 U1.102 U1.103 U1.104 U1.105 U1.106 U1.111 U1.112 U1.113 U1.114 U1.115 U1.116 U1.117 U1.118 U1.119 U1.120 U1.121 U1.122 U1.123 U1.124 U1.125 U1.126 U1.128 U1.129 U1.130 U1.131 U1.132 U1.133 U1.134 U1.135 U1.136 U1.137 U1.140 U1.141 U1.142 U1.143 U1.144 U2.1 U2.2 U2.3 U2.5 U2.6 U2.7 U3.1 U3.2 U3.3 U3.4 U3.5 U3.6 U3.8 U3.9 U3.10 U3.11 U3.12 U3.13 U3.14 U5.1 U5.2 U5.4 U5.5 U5.6 U5.7 U5.8 U6.1 U6.2 U6.4 U6.5 U6.6 U6.7 U6.8 U7.1 U7.2 U7.4 U7.5 U7.6 U7.7 U7.8 U8.1 U9.1 U9.2 U9.4 U10.1 U10.3 U11.3 U12.1 U12.2 U12.3 U12.4 U12.5 U12.6 U12.8 U12.9 U12.10 U12.11 U12.12 U12.13 U12.14 U13.1 U13.2 U13.3 U13.4 U13.5 U13.6 U13.8 U13.9 U13.10 U13.11 U13.12 U13.13 U13.14 U13.15 U13.16 U13.17 U13.19 U13.20 U13.22 U13.23 U13.24 U13.27 U13.28 U14.2 U14.3 U14.6 U14.7 U14.8 USB1.1 USB1.2 USB1.3 USB1.4 USB1.X Y1.1 Y1.2 Y2.1 Y2.2